# Altium PCB single_attiny85_board.PcbDoc
Units mm, origin at the board's own origin, x right, y up, seen from the top; angles counter-clockwise.
Board outline 26.8 x 17.78 mm, 2 copper layers (Top Layer, Bottom Layer); 8 components, 10 nets, 50 pads, 24 vias.
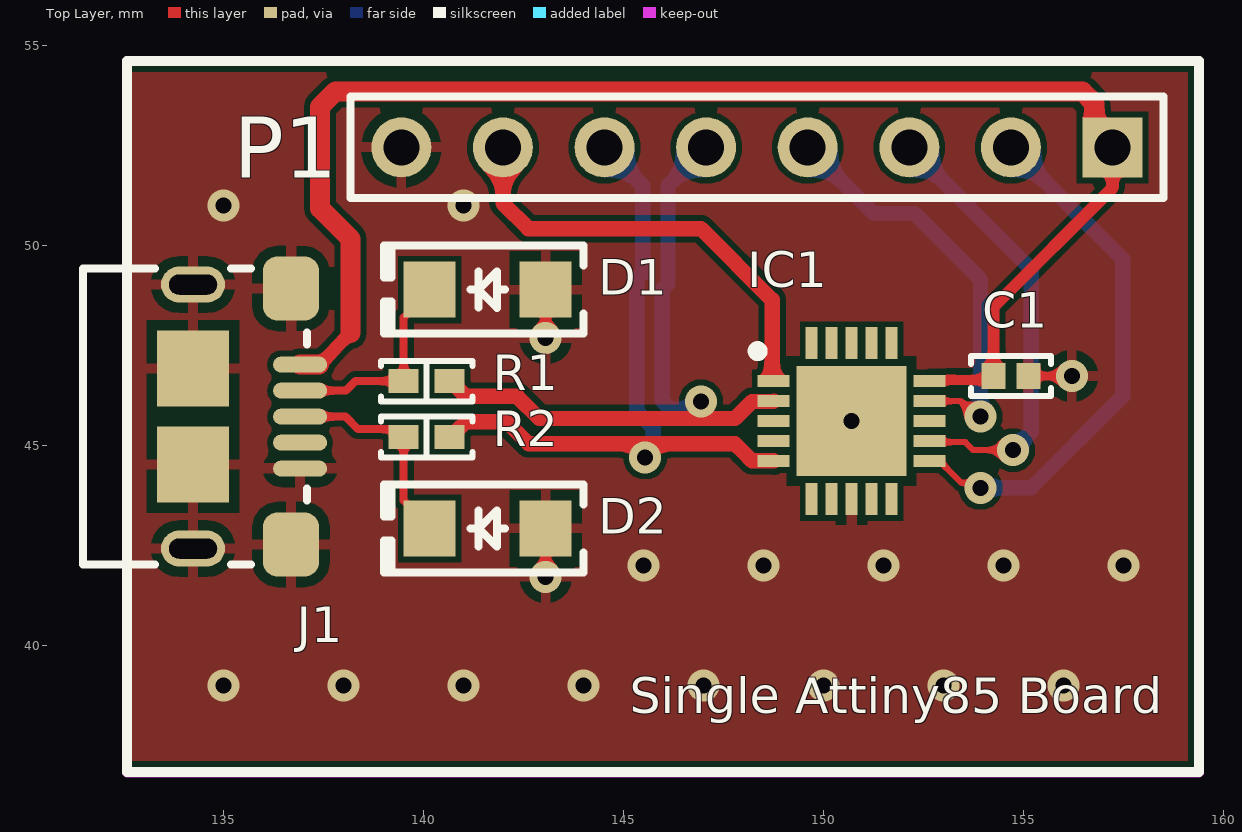
[diagram p0: Top Layer view]
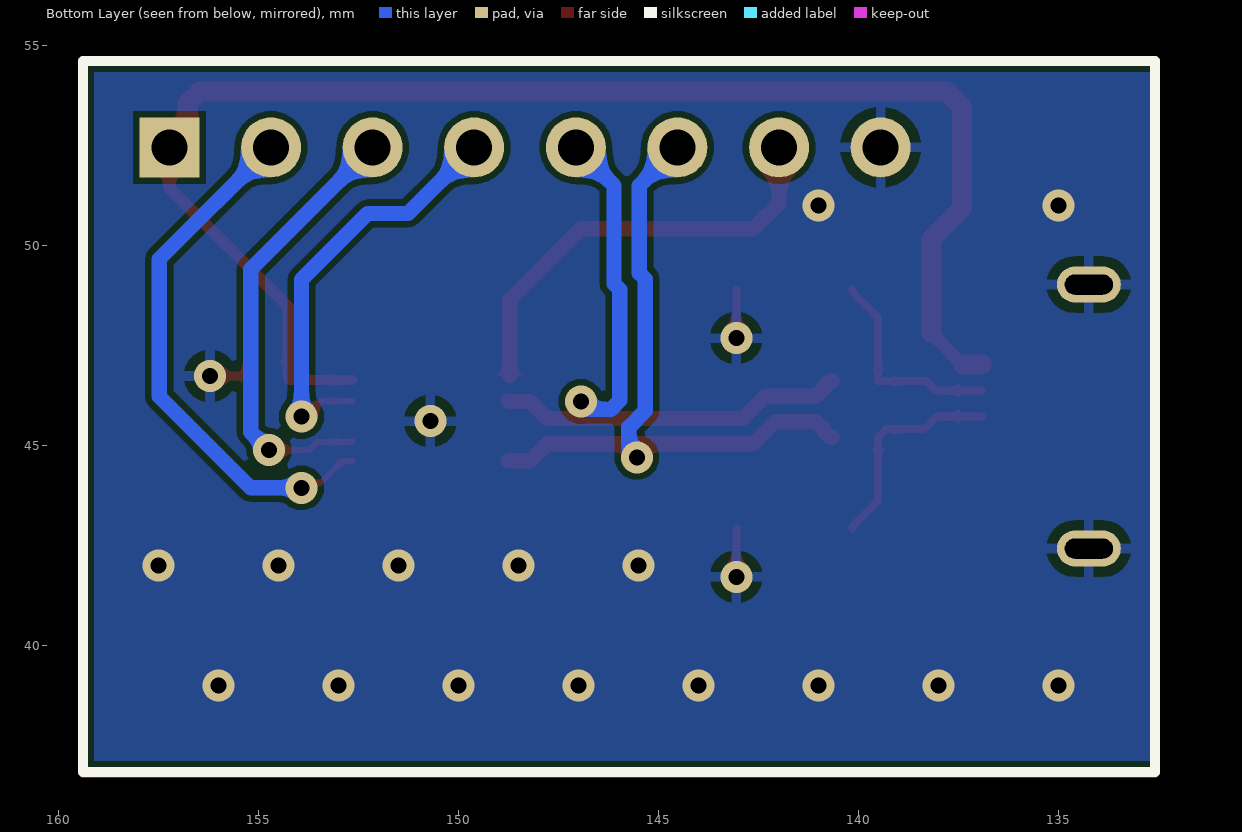
[diagram p1: Bottom Layer view, seen from below]

## Layer stack, top to bottom
Top Solder: solder mask 0.0102, Solder Resist, Dk 3.5
Top Layer: signal copper 0.0356
Dielectric 1: dielectric 0.32, FR-4, Dk 4.8
Bottom Layer: signal copper 0.0356
Bottom Solder: solder mask 0.0102, Solder Resist, Dk 3.5

## Board outline
132.588,36.834 132.588,54.61 159.385,54.61 159.385,36.834

## Design rules (kind name [scope] priority, off if disabled: settings)
Clearance [All] p1: gap=0.152 ignorepadtopadclearanceinfootprint=FALSE
DiffPairsRouting [All] p1: maxlimit=0.254 minlimit=0.254 mostfreqgap=0.254 toplayer_minwidth=0.381 toplayer_maxwidth=0.381 toplayer_prefwidth=0.381 bottomlayer_minwidth=0.381 bottomlayer_maxwidth=0.381 bottomlayer_prefwidth=0.381 maxuncoupledlength=12.7
PolygonConnect [All] p1: connectstyle=Relief reliefconductorwidth=0.254 reliefentries=4 polygonreliefangle="90 Angle" airgapwidth=0.254
RoutingVias [All] p1: holewidth=0.4 width=0.8 viastyle="Through Hole" minholewidth=0.3 minwidth=0.6 maxholewidth=5 maxwidth=10
SolderMaskExpansion [All] p1: expansion=0.102 istentingtop=FALSE
Width [All] p1: maxlimit=1 minlimit=0.152 preferedwidth=0.2 minimp=50.000000 maximp=50.000000 favimp=50.000000
29 further rules are at their usual default settings.

## Classes and differential pairs
differential pair DATA: +DATA_P -DATA_N

## Components (designator, comment, footprint, x,y, rotation, side; value= is the part's Value field where it differs from the comment)
C1 "0.1 µF" "CAP 0402_1005" 154.686,46.736 r180 top
D1 "VTVS40ASMF-M3-08" "SMF DO-219AB" 141.605,48.895 r180 top
D2 "VTVS40ASMF-M3-08" "SMF DO-219AB" 141.605,42.926 r180 top
IC1 "ATTINY85-20MU" QFN50P400X400X80-21N-D 150.704,45.609 r0 top
J1 "10118193-0001LF" "FCI USB 10118193-0001LF" 134.289,45.722 r90 top
P1 "Header 8" HDR1X8 157.226,52.451 r180 top
R1 "47 Ohms" "RES 0402_1005" 140.081,46.609 r0 top
R2 "47 Ohms" "RES 0402_1005" 140.081,45.212 r0 top

## Footprints (in the part's own frame and the unit in brackets; to place one, negate y for a bottom-side part, rotate by r counter-clockwise, add the part's x,y. Pads: shape width x height; smd on the part's side, far side on the other; paste and mask are expansions set on the pad)
"CAP 0402_1005" [mm] "Chip Capacitor, 2-Leads, Body 1.02x0.51mm, IPC Medium Density"
  rect 0.6x0.64 smd: 1(-0.44,0) 2(0.44,0)
  silkscreen extent -1,-0.5 1,0.5, body extent -0.5,-0.26 0.5,0.26, height 0.52
"FCI USB 10118193-0001LF" [mm] "USB 2.0 Type B Micro"
  oval 0.4x1.35 smd: 1(1.3,-2.625) 2(0.65,-2.625) 3(0,-2.625) 4(-0.65,-2.625) 5(-1.3,-2.625)
  oval 0.9x1.6 hole 0.5 slot 1.2 at 90 deg: S(-3.3,0.05) S(3.3,0.05)
  rrect50% 1.6x1.4 smd: S(-3.2,-2.4) S(3.2,-2.4)
  rect 1.9x1.8 smd: S(-1.2,0.05) S(1.2,0.05)
  silkscreen extent -3.7,-2.8 3.7,2.8, body extent -3.93,-2.9 3.93,2.76, height 2.78
HDR1X8 [mm] "Connector; Header; 8 Position"
  rect 1.5x1.5 hole 0.9: 1(0,0)
  round 1.5 hole 0.9: 2(2.54,0) 3(5.08,0) 4(7.62,0) 5(10.16,0) 6(12.7,0) 7(15.24,0) 8(17.78,0)
  silkscreen extent -1.27,-1.27 19.05,1.27
QFN50P400X400X80-21N-D [mm]
  rect 0.8x0.3 smd: 1(-1.95,1) 2(-1.95,0.5) 3(-1.95,0) 4(-1.95,-0.5) 5(-1.95,-1) 11(1.95,-1) 12(1.95,-0.5) 13(1.95,0) 14(1.95,0.5) 15(1.95,1)
  rect 0.3x0.8 smd: 6(-1,-1.95) 7(-0.5,-1.95) 8(0,-1.95) 9(0.5,-1.95) 10(1,-1.95) 16(1,1.95) 17(0.5,1.95) 18(0,1.95) 19(-0.5,1.95) 20(-1,1.95)
  rect 2.75x2.75 smd: 21(0,0)
  silkscreen extent -2.47,1.63 -2.22,1.87, body extent -2.05,-2.05 2.05,2.05, height 0.8
"RES 0402_1005" [mm] "Chip Resistor, 2-Leads, Body 1.0x0.5mm, IPC Medium Density"
  rect 0.75x0.6 smd: 1(-0.575,0) 2(0.575,0)
  silkscreen extent -1.14,-0.51 1.14,0.51, body extent -0.5,-0.25 0.5,0.25, height 0.35
"SMF DO-219AB" [mm] "Molded Diode, 2-Leads, Body 3.90x1.90mm, IPC Medium Density"
  rect 1.3x1.4 smd: 1(-1.45,0) 2(1.45,0)
  silkscreen extent -2.4,-1.1 2.59,1.1, body extent -1.5,-0.9 1.5,0.9, height 1.18

## Part data
C1: library part TMK105BJ104KVHF, "CAP CER 0.1UF 25V X5R 0402", Part Number=TMK105BJ104KVHF
D1 D2: "TVS DIODE 39.6V 67V DO219AB", Part Number=VTVS40ASMF-M3-08
IC1: "Integrated Circuit", Manufacturer_Name=Microchip, Mouser Part Number=556-ATTINY85-20MU, Arrow Part Number=ATTINY85-20MU, Arrow Price/Stock=https://www.arrow.com/en/products/attiny85-20mu/microchip-technology?region=nac, Datasheet Link=http://www.atmel.com/Images/Atmel-2586-AVR-8-bit-Microcontroller-ATtiny25-ATtiny45-ATtiny85_Datasheet.pdf, Height=0.8mm, Manufacturer_Part_Number=ATTINY85-20MU, Mouser Price/Stock=https://www.mouser.co.uk/ProductDetail/Microchip-Technology-Atmel/ATTINY85-20MU?qs=8jWQYweyg6PrfFUt16UN%252Bg%3D%3D
J1: "CONN RCPT USB2.0 MICRO B SMD R/A", Part Number=10118193-0001LF
P1: "Header, 8-Pin", LatestRevisionDate=17-Jul-2002, LatestRevisionNote="Re-released for DXP Platform.", Publisher="Altium Limited"
R1 R2: library part RMCF0402FT47R0, "RES 47 OHM 1% 1/16W 0402", Part Number=RMCF0402FT47R0

## Via types
v1: diameter 0.8, hole 0.4, Top Layer to Bottom Layer, tented both sides, 24 vias

## Nets (pads, with @x,y where several pads share a name; then routed paths per layer and width w, separated by ;. In a path a pad name is that pad's centre, name@x,y a point inside that pad or via, vN(x,y) a via of type N, cw(c..) or ccw(c..) an arc to the next point about the centre after c; other vN are vias at no path point)
DATA_N: IC1.2 P1.5 R1.2 | length 16.6
  Top Layer w0.381: R1.2 140.731,46.609 140.841,46.5 140.841,46.451 141.064,46.228 142.342,46.228 142.893,45.676 147.788,45.676 148.011,45.9 148.011,45.901 148.212,46.102 148.747,46.102 IC1.2
  Bottom Layer w0.381: v1(146.939,46.101) 146.826,46.101 146.626,45.901 146.191,45.901 145.967,46.125 145.967,48.897 146.113,49.043 146.113,51.498 P1.5
DATA_P: IC1.5 P1.6 R2.2 | length 17.1
  Top Layer w0.381: R2.2 140.731,45.212 140.841,45.321 140.841,45.37 141.064,45.593 142.079,45.593 142.63,45.041 147.788,45.041 148.011,44.818 148.011,44.817 148.212,44.616 148.747,44.616 IC1.5
  Bottom Layer w0.381: P1.6 145.478,51.498 145.478,49.306 145.332,49.16 145.332,45.861 145.742,45.452 145.742,45.017 145.542,44.817 v1(145.542,44.704)
GND: C1.1 D1.1 D2.1 IC1.8 IC1.21 J1.5 J1.S P1.8 | length 3.8
  Top Layer w0.2: v1(143.055,41.715) D2.1 ; v1(143.055,47.684) D1.1 ; C1.1 155.126,46.756 155.326,46.956 155.326,46.736 v1(156.21,46.736)
  other v1: 135,39 138,39 141,39 144,39 147,39 150,39 153,39 156,39 145.5,42 148.5,42 151.5,42 154.5,42 157.5,42 150.704,45.609 135,51 141,51
NetD1_2: D1.2 J1.2 R1.1 | length 5.2
  Top Layer w0.2: J1.2 138.066,46.372 138.303,46.609 R1.1 139.506,48.196 140.155,48.845 D1.2
NetD2_2: D2.2 J1.3 R2.1 | length 5.4
  Top Layer w0.2: J1.3 138.047,45.722 138.357,45.412 139.306,45.412 R2.1 139.506,43.625 140.155,42.976 D2.2
PB0: IC1.11 P1.2 | length 13.4
  Top Layer w0.152: IC1.11 152.904,44.609 153.447,44.066 153.8,44.066 v1(153.924,43.942)
  Bottom Layer w0.381: v1(153.924,43.942) 155.194,43.942 157.48,46.228 157.48,49.657 P1.2
PB1: IC1.12 P1.3 | length 11.2
  Top Layer w0.152: IC1.12 152.678,45.085 153.543,45.085 153.745,44.883 v1(154.738,44.883)
  Bottom Layer w0.381: P1.3 155.194,49.403 155.194,45.339 v1(154.738,44.883)
PB2: IC1.14 P1.4 | length 10.5
  Top Layer w0.152: IC1.14 153.424,46.109 153.813,45.72 v1(153.924,45.72)
  Bottom Layer w0.381: P1.4 151.257,50.8 152.273,50.8 153.924,49.149 v1(153.924,45.72)
PB5: IC1.1 P1.7 | length 11
  Top Layer w0.381: P1.7 141.986,51.054 142.621,50.419 146.939,50.419 148.717,48.641 IC1.1@148.717,46.736
VUSB: C1.2 IC1.15 J1.1 P1.1 | length 37
  Top Layer w0.254: IC1.15@152.654,46.64 C1.2@154.246,46.64
  Top Layer w0.3: J1.1@137.389,47.022 138.176,47.809 ; C1.2 154.246,48.455 157.226,51.435 P1.1
  Top Layer w0.5: J1.1 J1.1@137.389,47.022 ; 138.176,47.809 138.176,50.165 137.414,50.927 137.414,53.467 137.795,53.848 156.477,53.848 156.769,53.555 156.769,52.908 P1.1
pads on no net: IC1.3 IC1.4 IC1.6 IC1.7 IC1.9 IC1.10 IC1.13 IC1.16 IC1.17 IC1.18 IC1.19 IC1.20 J1.4

## Polygon pours and split planes (outlines as drawn)
GND on Top Layer "GND_L01_P000" (solid, pour order 0): 132.588,54.61 132.588,36.83 159.385,36.83 159.385,54.61
GND on Bottom Layer "GND_L02_P001" (solid, pour order 1): 132.588,54.61 132.588,36.83 159.385,36.83 159.385,54.61

## Keep-outs
Keep-Out Layer:
  lines w0.254: 132.588,36.83 159.385,36.83 159.385,54.61 132.588,54.61

## Silkscreen, mask and mechanical layers (free items; w line width, h text height)
Top Overlay:
  the board outline again, w0.254
  text "Single Attiny85 Board" at 145.161,38.006 h1.52
Bottom Overlay:
  the board outline again, w0.254